# Altium PCB PCB2.PcbDoc
Units mm, origin at the board's own origin, x right, y up, seen from the top; angles counter-clockwise.
Board outline 90 x 105 mm, 2 copper layers (Top Layer, Bottom Layer); 6 components, 6 nets, 82 pads, 9 vias.
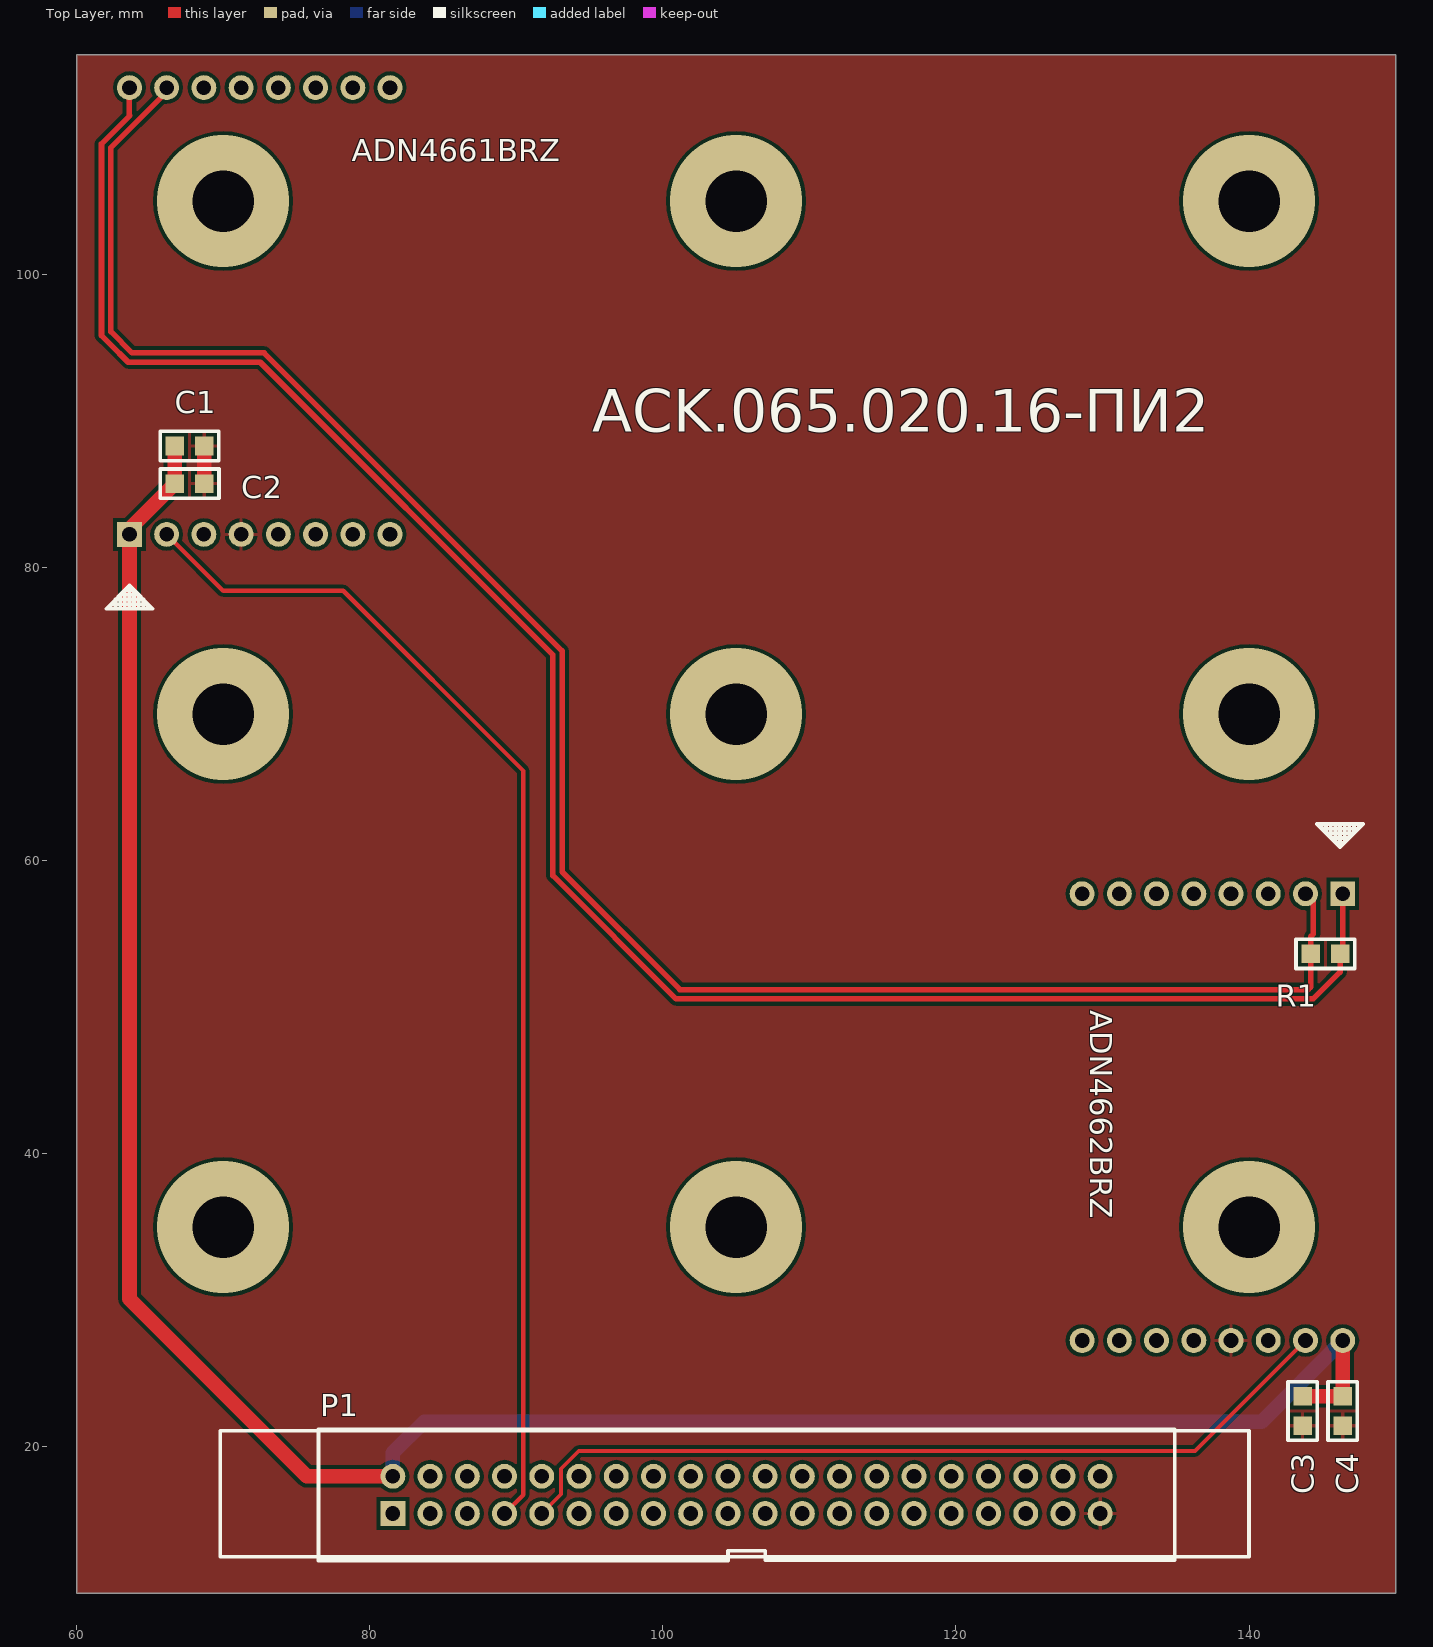
[diagram p0: Top Layer view]
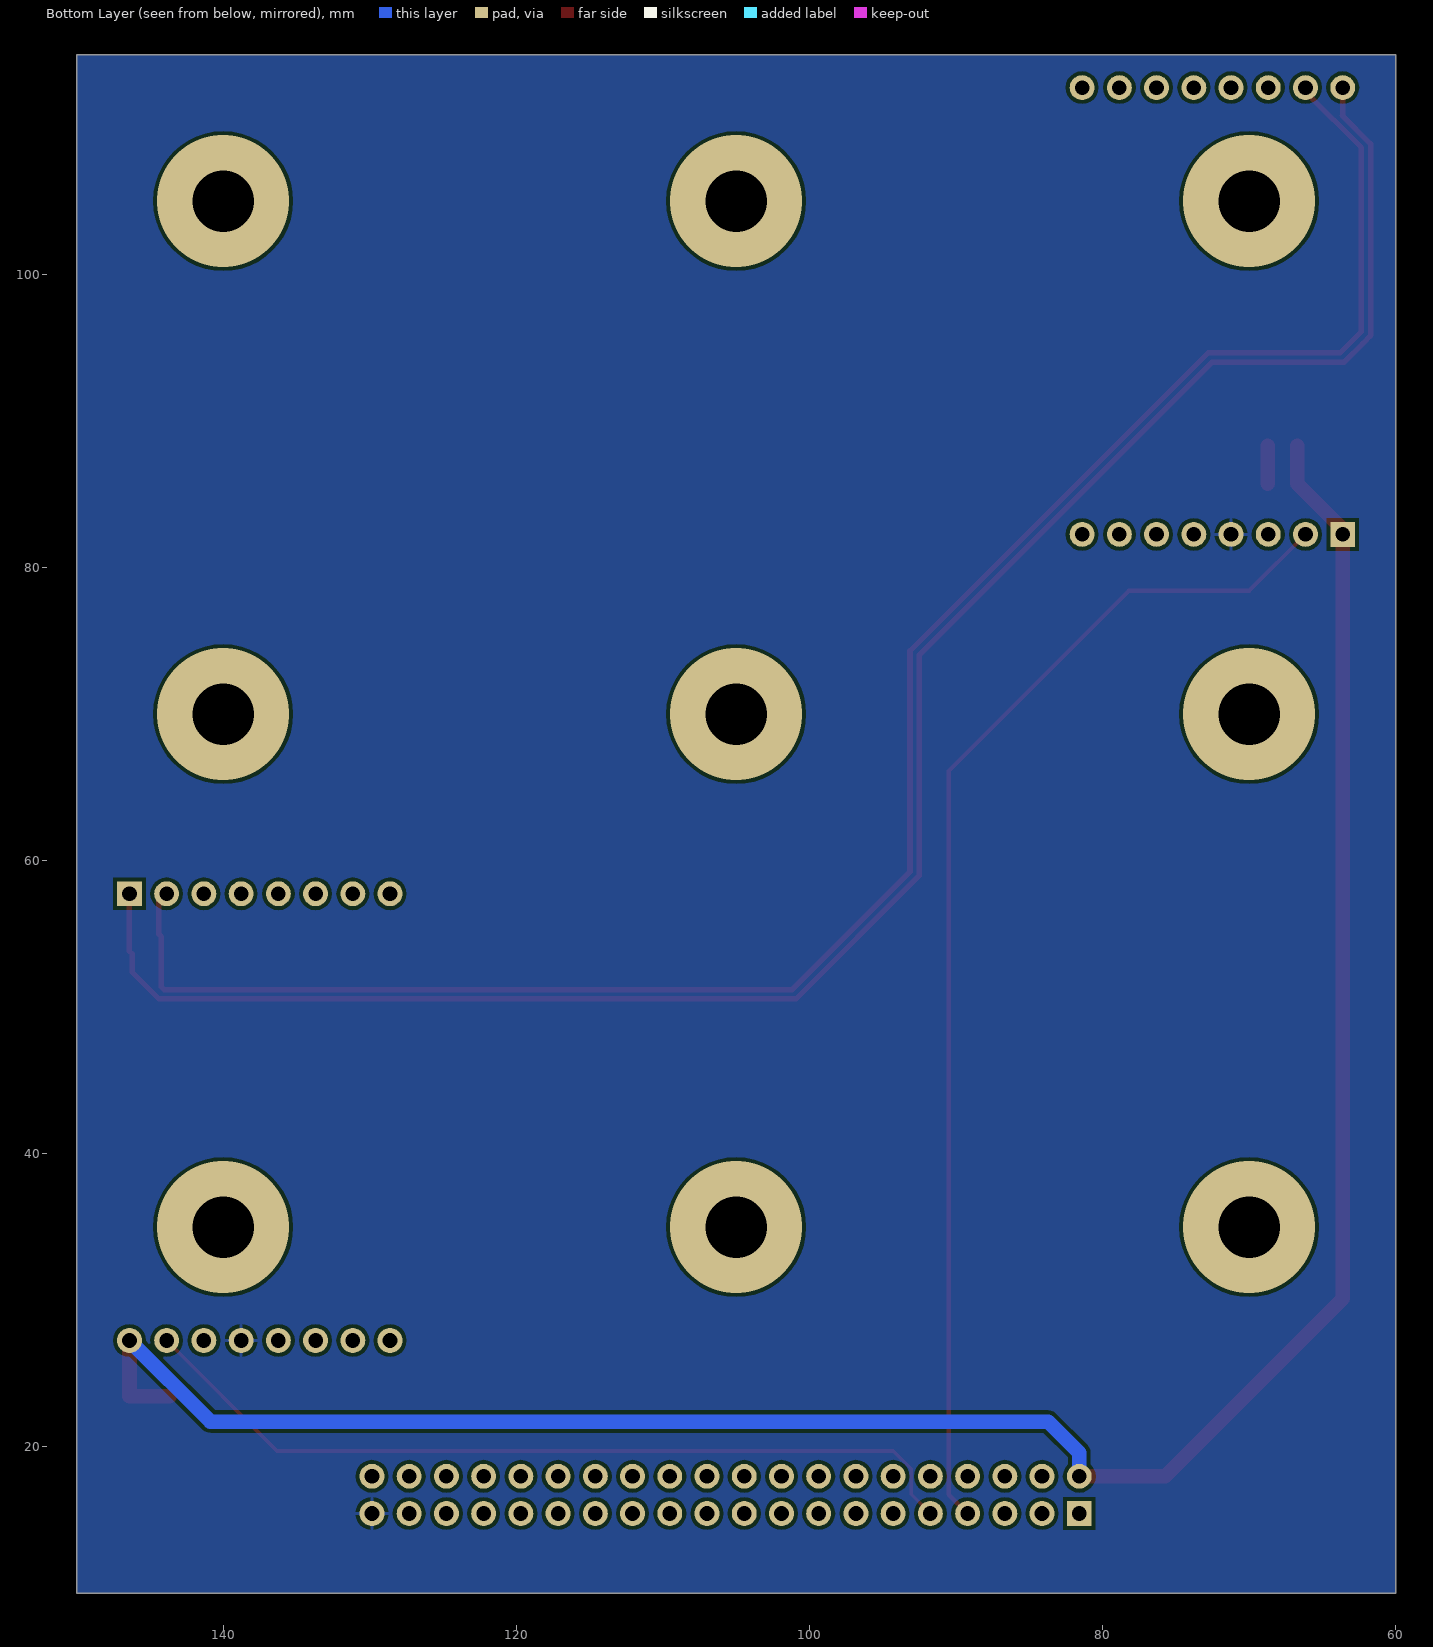
[diagram p1: Bottom Layer view, seen from below]

## Layer stack, top to bottom
Top Solder: solder mask 0.0102, Solder Resist, Dk 3.5
Top Layer: signal copper 0.0356
Dielectric 1: dielectric 0.32, FR-4, Dk 4.8
Bottom Layer: signal copper 0.0356
Bottom Solder: solder mask 0.0102, Solder Resist, Dk 3.5

## Board outline
60,10 150,10 150,115 60,115

## Design rules (kind name [scope] priority, off if disabled: settings)
Clearance [All] p1: gap=0.254
ComponentClearance [All] p1 off: gap=0.254 collisioncheckmode=3 verticalgap=0.254 showdistances=FALSE
DiffPairsRouting [All] p1: maxlimit=0.254 minlimit=0.254 mostfreqgap=0.254 toplayer_minwidth=0.381 toplayer_maxwidth=0.381 toplayer_prefwidth=0.381 bottomlayer_minwidth=0.381 bottomlayer_maxwidth=0.381 bottomlayer_prefwidth=0.381 maxuncoupledlength=12.7
HoleSize [All] p1: absolutevalues=TRUE maxlimit=5 minlimit=0.025 maxpercent=80.000 minpercent=20.000
PolygonConnect [All] p1: connectstyle=Relief reliefconductorwidth=0.254 reliefentries=4 polygonreliefangle="90 Angle" airgapwidth=0.254
RoutingVias [All] p1: holewidth=0.711 width=1.27 viastyle="Through Hole" minholewidth=0.711 minwidth=1.27 maxholewidth=5 maxwidth=10
SilkToSolderMaskClearance [IsPad] p1: minsilkscreentomaskgap=0.1 clearancetoexposedcopper=TRUE
SolderMaskExpansion [All] p1: expansion=0.102
Width [InNetClass('other')] p1: maxlimit=0.3 minlimit=0.3 preferedwidth=0.3
Width Widthpower [InNetClass('power')] p2: maxlimit=1 minlimit=1 preferedwidth=1
26 further rules are at their usual default settings.

## Classes and differential pairs
net class power: GND VCC
net class other: INPUT LVDS_N LVDS_P
differential pair NewDifferentialPair1: +LVDS_P -LVDS_N

## Components (designator, comment, footprint, x,y, rotation, side; value= is the part's Value field where it differs from the comment)
C1 "0.1uF" C_0805 67.713,85.725 r0 top
C2 "1uF" C_0805 67.713,88.293 r0 top
C3 "0.1uF" C_0805 143.653,22.45 r270 top
C4 "1uF" C_0805 146.39,22.45 r270 top
P1 "IDC-40" IDC-40 105.713,16.725 r90 top
R1 "100 Om" R_0805 145.209,53.645 r0 top

## Footprints (in the part's own frame and the unit in brackets; to place one, negate y for a bottom-side part, rotate by r counter-clockwise, add the part's x,y. Pads: shape width x height; smd on the part's side, far side on the other; paste and mask are expansions set on the pad)
C_0805 [mm]
  rect 1.27x1.27 smd: 1(-1,0) 2(1,0)
  silkscreen extent -2,-1 2,1
IDC-40 [mm]
  rect 1.7x1.7 hole 1: 1(-1.27,24.13)
  round 1.7 hole 1: 2(1.27,24.13) 3(-1.27,21.59) 4(1.27,21.59) 5(-1.27,19.05) 6(1.27,19.05) 7(-1.27,16.51) 8(1.27,16.51) 9(-1.27,13.97) 10(1.27,13.97) 11(-1.27,11.43) 12(1.27,11.43) 13(-1.27,8.89) 14(1.27,8.89) 15(-1.27,6.35) 16(1.27,6.35) 17(-1.27,3.81) 18(1.27,3.81) 19(-1.27,1.27) 20(1.27,1.27) 21(-1.27,-1.27) 22(1.27,-1.27) 23(-1.27,-3.81) 24(1.27,-3.81) 25(-1.27,-6.35) 26(1.27,-6.35) 27(-1.27,-8.89) 28(1.27,-8.89) 29(-1.27,-11.43) 30(1.27,-11.43) 31(-1.27,-13.97) 32(1.27,-13.97) 33(-1.27,-16.51) 34(1.27,-16.51) 35(-1.27,-19.05) 36(1.27,-19.05) 37(-1.27,-21.59) 38(1.27,-21.59) 39(-1.27,-24.13) 40(1.27,-24.13)
  silkscreen extent -4.47,-29.21 4.48,29.21
R_0805 [mm]
  rect 1.27x1.27 smd: 1(-1,0) 2(1,0)
  silkscreen extent -2,-1 2,1

## Part data
C1 C2 C3 C4: library part "capacitor 0805"
P1: "разъем 2529"
R1: library part "resistor 0805"

## Free pads (board coordinates)
  rect 1.7x1.7 hole 1: 1(63.61,82.26) 1(146.39,57.74)
  round 1.7 hole 1: 2(66.15,82.26) 2(143.85,57.74) 3(68.69,82.26) 3(141.31,57.74) 4(71.23,82.26) 4(128.61,27.26) 4(128.61,57.74) 4(138.77,57.74) 5(71.23,112.74) 5(73.77,82.26) 5(73.77,112.74) 5(76.31,82.26) 5(76.31,112.74) 5(78.85,82.26) 5(78.85,112.74) 5(81.39,82.26) 5(81.39,112.74) 5(131.15,27.26) 5(131.15,57.74) 5(133.69,27.26) 5(133.69,57.74) 5(136.23,27.26) 5(136.23,57.74) 5(138.77,27.26) 6(68.69,112.74) 6(141.31,27.26) 7(66.15,112.74) 7(143.85,27.26) 8(63.61,112.74) 8(146.39,27.26)

## Via types
v1: diameter 9, hole 4.2, Top Layer to Bottom Layer, 9 vias

## Nets (pads, with @x,y where several pads share a name; then routed paths per layer and width w, separated by ;. In a path a pad name is that pad's centre, name@x,y a point inside that pad or via, vN(x,y) a via of type N, cw(c..) or ccw(c..) an arc to the next point about the centre after c; other vN are vias at no path point)
GND: C1.2 C2.2 C3.2 C4.2 P1.39 pad.4@71.23,82.26 pad.5@138.77,27.26 | length 2.6
  Top Layer w1: C1.2 C2.2
INPUT: P1.7 pad.2@66.15,82.26 | length 82.2
  Top Layer w0.3: pad.2@66.15,82.26 70,78.41 78.197,78.41 90.489,66.118 90.489,16.741 P1.7
LVDS_N: pad.2@143.85,57.74 pad.7@66.15,112.74 R1.1 | length 134.2
  Top Layer w0.381: pad.7@66.15,112.74 66.15,112.453 62.34,108.643 62.34,96.092 63.791,94.641 72.797,94.641 93.135,74.303 93.135,59.239 101.17,51.204 144.023,51.204 144.209,51.39 144.209,52.82 R1.1 144.209,54.819 144.39,55 144.39,57.2 pad.2@143.85,57.74
LVDS_P: pad.1@146.39,57.74 pad.8@63.61,112.74 R1.2 | length 135.7
  Top Layer w0.381: pad.8@63.61,112.74 63.61,110.868 63.638,110.84 61.705,108.906 61.705,95.829 62.237,95.297 63.528,94.006 72.534,94.006 92.5,74.04 92.5,58.976 100.907,50.569 144.375,50.569 146.209,52.403 R1.2 ; R1.2@146.39,53.826 pad.1@146.39,57.74
OUTPUT: P1.9 pad.7@143.85,27.26 | length 58
  Top Layer w0.254: P1.9 93.052,16.764 93.052,18.505 94.272,19.725 136.315,19.725 pad.7@143.85,27.26
VCC: C1.1 C2.1 C3.1 C4.1 P1.2 pad.1@63.61,82.26 pad.8@146.39,27.26 | length 158.6
  Top Layer w1: C2.1 C1.1 63.61,82.622 63.61,82.26 63.61,30.098 75.713,17.995 P1.2 ; C3.1 C4.1 pad.8@146.39,27.26
  Bottom Layer w1: P1.2 81.583,19.595 83.713,21.725 140.855,21.725 pad.8@146.39,27.26
pads on no net: P1.1 P1.3 P1.4 P1.5 P1.6 P1.8 P1.10 P1.11 P1.12 P1.13 P1.14 P1.15 P1.16 P1.17 P1.18 P1.19 P1.20 P1.21 P1.22 P1.23 P1.24 P1.25 P1.26 P1.27 P1.28 P1.29 P1.30 P1.31 P1.32 P1.33 P1.34 P1.35 P1.36 P1.37 P1.38 P1.40
copper on no net:
  other v1: 70,35 105,35 140,35 70,70 105,70 140,70 70,105 105,105 140,105

## Polygon pours and split planes (outlines as drawn)
GND on Bottom Layer "bot Layer-GND" (solid, pour order 6): 60,115 150,115 150,10 60,10
GND on Top Layer "top layer gnd" (solid, pour order 8): 60,115 150,115 150,10 60,10

## Silkscreen, mask and mechanical layers (free items; w line width, h text height)
Top Overlay:
  lines w0.254: 62.34,77.182 62.34,77.5 64.88,77.5 64.88,77.182 ; 62.657,77.182 62.657,77.817 64.562,77.817 64.562,77.182 ; 62.975,77.182 62.975,78.135 64.245,78.135 64.245,77.182 ; 63.292,77.182 63.292,78.452 63.927,78.452 63.927,77.182 ; 63.61,77.182 63.61,78.77 ; 144.939,62.5 144.939,62.182 147.479,62.182 147.479,62.5 ; 145.257,62.5 145.257,61.865 147.162,61.865 147.162,62.5 ; 145.574,62.5 145.574,61.547 146.844,61.547 146.844,62.5 ; 145.892,62.5 145.892,61.23 146.527,61.23 146.527,62.5 ; 146.209,62.5 146.209,60.912 ; 63.61,78.77 65.197,77.182 62.022,77.182 63.61,78.77 ; 146.209,60.912 144.622,62.5 147.797,62.5 146.209,60.912 ; 69.8,12.5 69.8,21.1 140,21.1 140,12.5 69.8,12.5
  text "ADN4661BRZ" at 78.763,107.725 h1.52
  text "ACK.065.020.16-ПИ2" at 95.179,88.292 h5
  text "ADN4662BRZ" at 129.167,49.803 h1.52 r270
Mechanical 1:
  the board outline again, w1